# EAGLE board Prototype (EAGLE 4.16)
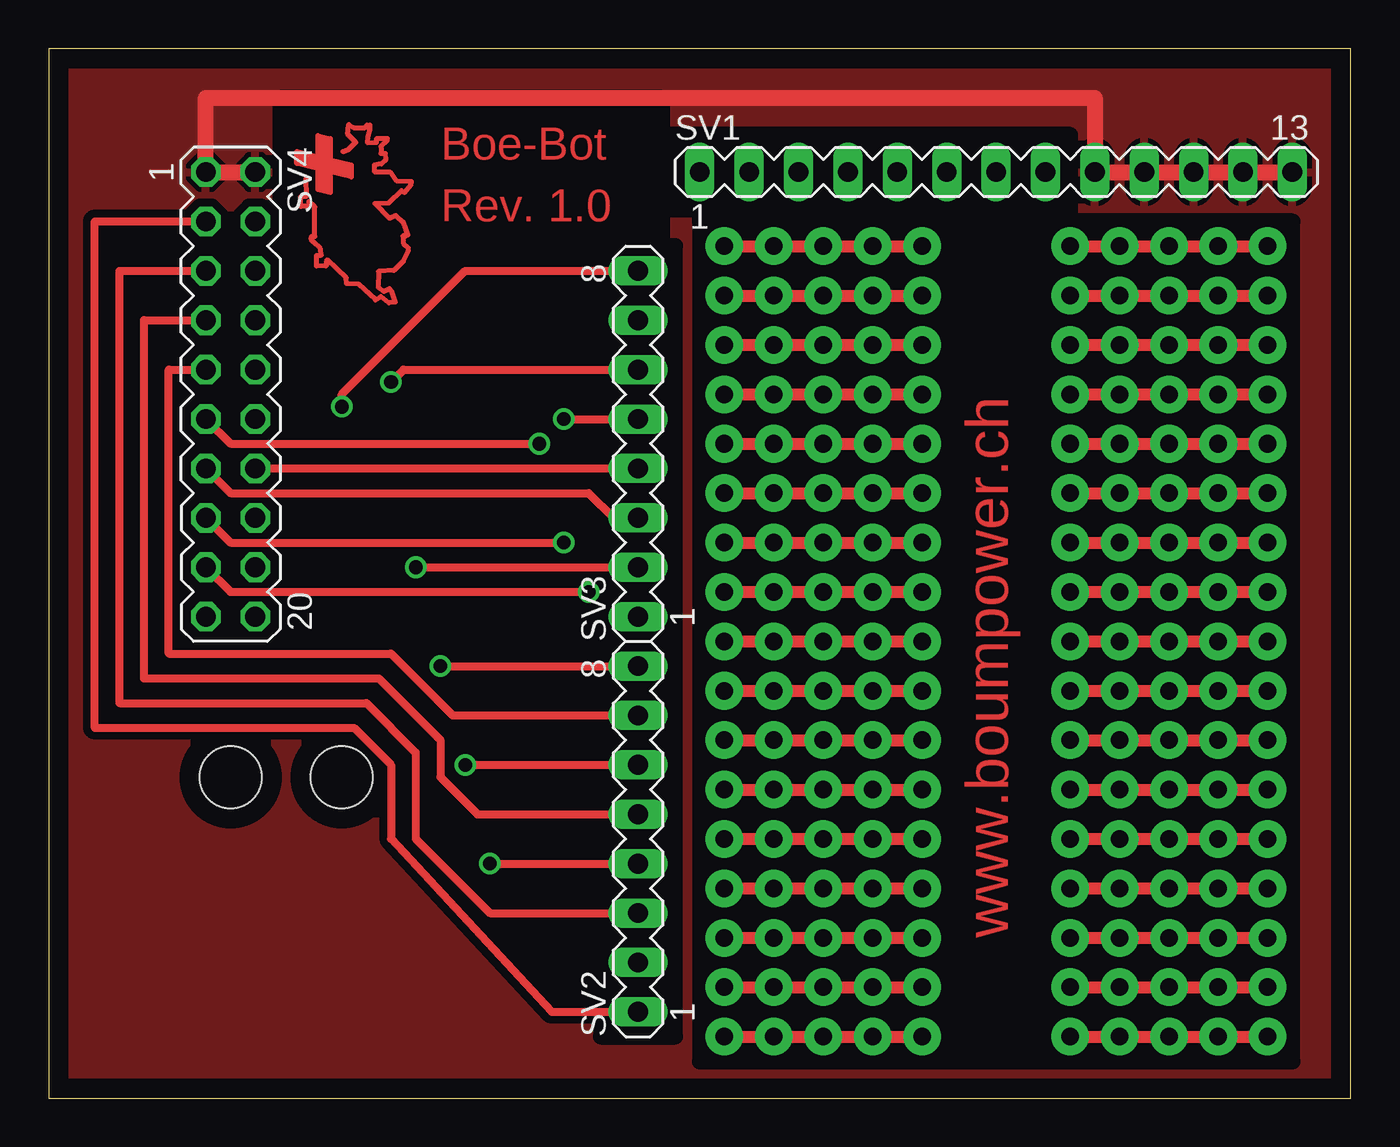
[diagram p0: board, top side]
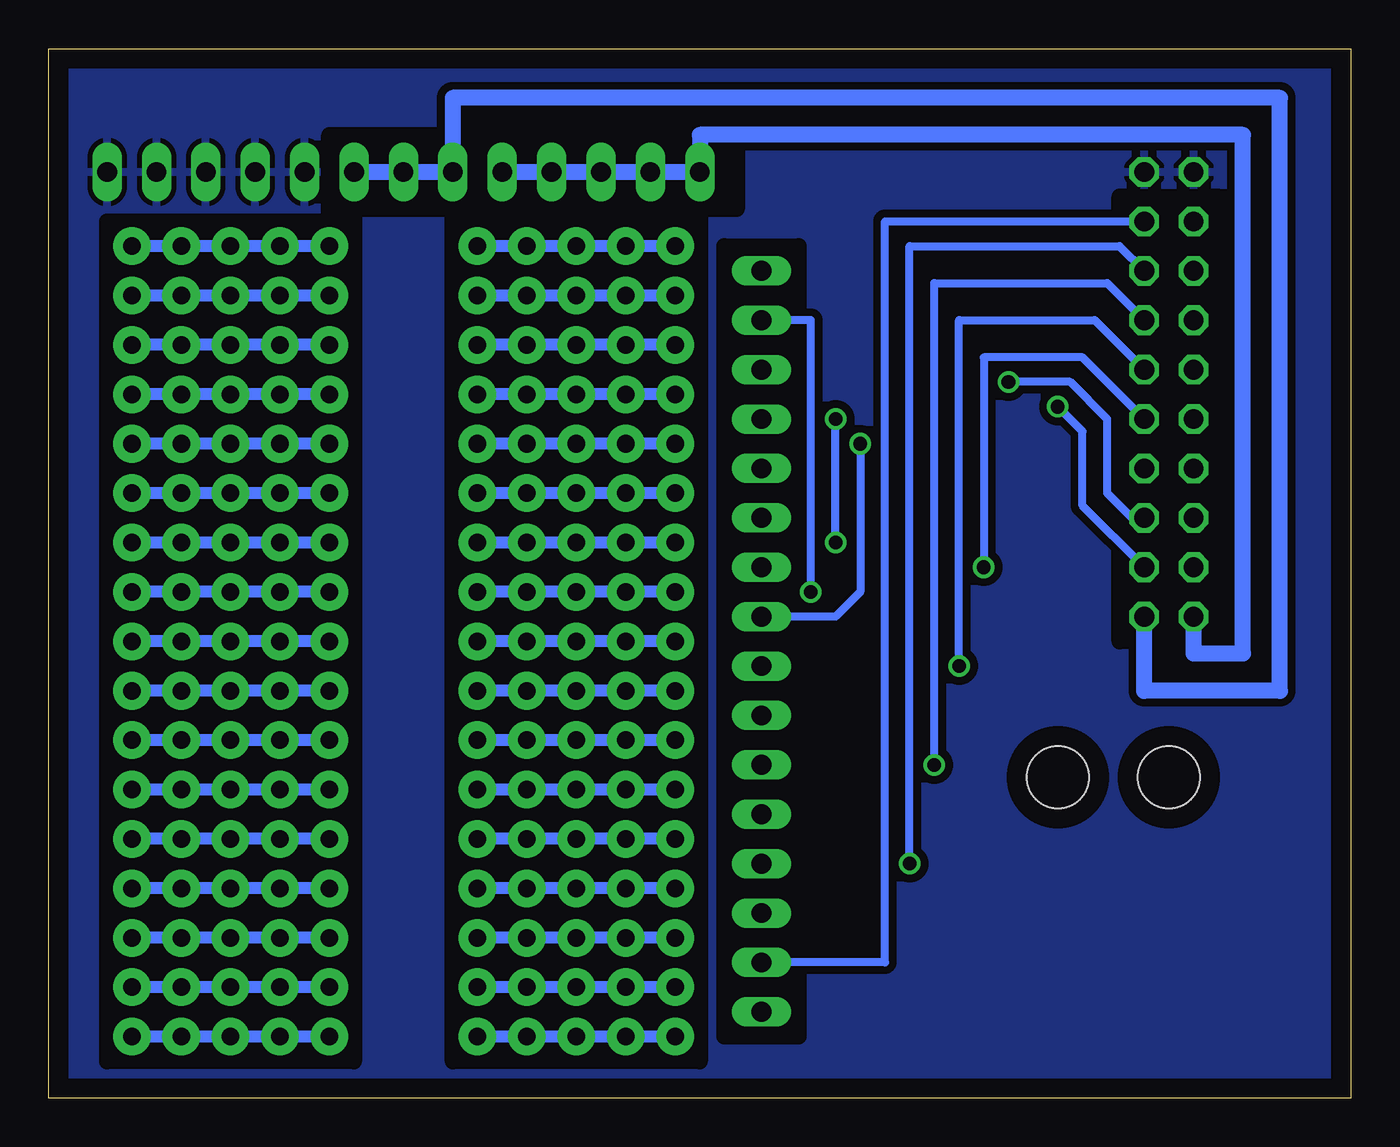
[diagram p1: board, bottom side, seen from below]

Size 66.98 x 53.96 mm. Coordinates in mm from the lower left corner, seen from the top.
Outline: 0,0 66.98,0 66.98,53.96 0,53.96 0,0
Copper layers (1*16): Top 0.035mm / dielectric 1.5mm / Bottom 0.035mm
Design rules "Olimex 10mils": minimum track width 10mil, minimum drill 24mil, track to track 10mil, track to pad 10mil, pad to pad 10mil, via to via 10mil, smd to smd 10mil, copper to edge 40mil, drill to drill 10mil, minimum pad ring 10mil, minimum via ring 8mil, stop-mask expansion 0mil, vias tented up to drill 0mil, thermal gap 10mil
Holes 3.2 mm at 9.36,16.51 15.07,16.51
tRestrict: area 44.9,7.6 to 52.5,38.7; area 11.9,39.4 to 31.6,51.4; area 33.5,1.9 to 64,45.1; area 28.4,3.2 to 32.2,43.8; area 31.6,45.7 to 52.5,49.5
bRestrict: area 33.5,1.9 to 46.2,45.1; area 51.3,1.9 to 64,45.1; area 28.4,3.2 to 32.2,43.8; area 6.8,23.5 to 11.9,46.4; area 31.6,45.7 to 52.5,49.5

## Footprints (pad centres in the part's own frame; a part is rotated, then mirrored left to right if it is on the bottom)
MA13-1 = drill 1.016 long: 1 -15.24,0; 2 -12.7,0; 3 -10.16,0; 4 -7.62,0; 5 -5.08,0; 6 -2.54,0; 7 0,0; 8 2.54,0; 9 5.08,0; 10 7.62,0; 11 10.16,0; 12 12.7,0; 13 15.24,0
MA08-1 = drill 1.016 long: 1 -8.89,0; 2 -6.35,0; 3 -3.81,0; 4 -1.27,0; 5 1.27,0; 6 3.81,0; 7 6.35,0; 8 8.89,0
MA10-2 = drill 1.016 octagon: 1 -11.43,-1.27; 2 -11.43,1.27; 3 -8.89,-1.27; 4 -8.89,1.27; 5 -6.35,-1.27; 6 -6.35,1.27; 7 -3.81,-1.27; 8 -3.81,1.27; 9 -1.27,-1.27; 10 -1.27,1.27; 11 1.27,-1.27; 12 1.27,1.27; 13 3.81,-1.27; 14 3.81,1.27; 15 6.35,-1.27; 16 6.35,1.27; 17 8.89,-1.27; 18 8.89,1.27; 19 11.43,-1.27; 20 11.43,1.27

## Placement (x,y rotation side)
SV1  [MA13-1]  48.73,47.62 0 top
SV2  [MA08-1]  30.32,13.33 90 top
SV3  [MA08-1]  30.32,33.65 90 top
SV4  [MA10-2]  9.36,36.19 270 top
U$1  SUISSE  [SUISSE]  15.71,45.71 90 top

## Library data of the parts
SV1-SV3 = con-lstb
SV4 = Boe-Bot
U$1 = BP_Symbol

## Nets
P0: SV2.1 SV4.3
P1: SV2.2 SV4.4
P2: SV2.3 SV4.5
P3: SV2.4 SV4.6
P4: SV2.5 SV4.7
P5: SV2.6 SV4.8
P6: SV2.7 SV4.9
P7: SV2.8 SV4.10
P8: SV3.1 SV4.11
P9: SV3.2 SV4.12
P10: SV3.3 SV4.13
P11: SV3.4 SV4.14
P12: SV3.5 SV4.15
P13: SV3.6 SV4.16
P14: SV3.7 SV4.17
P15: SV3.8 SV4.18
VDD: SV1.1 SV1.2 SV1.3 SV1.4 SV1.5 SV4.19
VIN: SV1.6 SV1.7 SV1.8 SV4.20
VSS: SV1.9 SV1.10 SV1.11 SV1.12 SV1.13 SV4.1 SV4.2

## Tracks (layer width: path | path; a pad name or v marks a point on that pad's centre or on a via)
N$1  (via drill 0.9 pad 1.93)
  Top 0.61: v34.76,41.27 v44.92,41.27
  Bottom 0.61: v34.76,41.27 v44.92,41.27
N$2  (via drill 0.9 pad 1.93)
  Top 0.61: v34.76,43.81 v44.92,43.81
  Bottom 0.61: v34.76,43.81 v44.92,43.81
N$3  (via drill 0.9 pad 1.93)
  other vias: 37.3,43.81
N$4  (via drill 0.9 pad 1.93)
  other vias: 39.84,43.81
N$5  (via drill 0.9 pad 1.93)
  other vias: 42.38,43.81
N$7  (via drill 0.9 pad 1.93)
  other vias: 37.3,41.27
N$8  (via drill 0.9 pad 1.93)
  other vias: 39.84,41.27
N$9  (via drill 0.9 pad 1.93)
  other vias: 42.38,41.27
N$11  (via drill 0.9 pad 1.93)
  Top 0.61: v52.54,43.81 v62.7,43.81
  Bottom 0.61: v52.54,43.81 v62.7,43.81
N$12  (via drill 0.9 pad 1.93)
  other vias: 55.08,43.81
N$13  (via drill 0.9 pad 1.93)
  other vias: 57.62,43.81
N$14  (via drill 0.9 pad 1.93)
  other vias: 60.16,43.81
N$17  (via drill 0.9 pad 1.93)
  other vias: 60.16,41.27
N$18  (via drill 0.9 pad 1.93)
  other vias: 57.62,41.27
N$19  (via drill 0.9 pad 1.93)
  other vias: 55.08,41.27
N$20  (via drill 0.9 pad 1.93)
  Top 0.61: v52.54,41.27 v62.7,41.27
  Bottom 0.61: v52.54,41.27 v62.7,41.27
N$21  (via drill 0.9 pad 1.93)
  Top 0.61: v34.76,38.73 v44.92,38.73
  Bottom 0.61: v34.76,38.73 v44.92,38.73
N$22  (via drill 0.9 pad 1.93)
  other vias: 37.3,38.73
N$23  (via drill 0.9 pad 1.93)
  other vias: 39.84,38.73
N$24  (via drill 0.9 pad 1.93)
  other vias: 42.38,38.73
N$26  (via drill 0.9 pad 1.93)
  Top 0.61: v52.54,38.73 v62.7,38.73
  Bottom 0.61: v52.54,38.73 v62.7,38.73
N$27  (via drill 0.9 pad 1.93)
  other vias: 55.08,38.73
N$28  (via drill 0.9 pad 1.93)
  other vias: 57.62,38.73
N$29  (via drill 0.9 pad 1.93)
  other vias: 60.16,38.73
N$32  (via drill 0.9 pad 1.93)
  other vias: 60.16,36.19
N$33  (via drill 0.9 pad 1.93)
  other vias: 57.62,36.19
N$34  (via drill 0.9 pad 1.93)
  other vias: 55.08,36.19
N$35  (via drill 0.9 pad 1.93)
  Top 0.61: v52.54,36.19 v62.7,36.19
  Bottom 0.61: v52.54,36.19 v62.7,36.19
N$37  (via drill 0.9 pad 1.93)
  other vias: 42.38,36.19
N$38  (via drill 0.9 pad 1.93)
  other vias: 39.84,36.19
N$39  (via drill 0.9 pad 1.93)
  other vias: 37.3,36.19
N$40  (via drill 0.9 pad 1.93)
  Top 0.61: v34.76,36.19 v44.92,36.19
  Bottom 0.61: v34.76,36.19 v44.92,36.19
N$41  (via drill 0.9 pad 1.93)
  Top 0.61: v34.76,33.65 v44.92,33.65
  Bottom 0.61: v34.76,33.65 v44.92,33.65
N$42  (via drill 0.9 pad 1.93)
  other vias: 37.3,33.65
N$43  (via drill 0.9 pad 1.93)
  other vias: 39.84,33.65
N$44  (via drill 0.9 pad 1.93)
  other vias: 42.38,33.65
N$46  (via drill 0.9 pad 1.93)
  Top 0.61: v52.54,33.65 v62.7,33.65
  Bottom 0.61: v52.54,33.65 v62.7,33.65
N$47  (via drill 0.9 pad 1.93)
  other vias: 55.08,33.65
N$48  (via drill 0.9 pad 1.93)
  other vias: 57.62,33.65
N$49  (via drill 0.9 pad 1.93)
  other vias: 60.16,33.65
N$52  (via drill 0.9 pad 1.93)
  other vias: 60.16,31.11
N$53  (via drill 0.9 pad 1.93)
  other vias: 57.62,31.11
N$54  (via drill 0.9 pad 1.93)
  other vias: 55.08,31.11
N$55  (via drill 0.9 pad 1.93)
  Top 0.61: v52.54,31.11 v62.7,31.11
  Bottom 0.61: v52.54,31.11 v62.7,31.11
N$57  (via drill 0.9 pad 1.93)
  other vias: 42.38,31.11
N$58  (via drill 0.9 pad 1.93)
  other vias: 39.84,31.11
N$59  (via drill 0.9 pad 1.93)
  other vias: 37.3,31.11
N$60  (via drill 0.9 pad 1.93)
  Top 0.61: v34.76,31.11 v44.92,31.11
  Bottom 0.61: v34.76,31.11 v44.92,31.11
N$61  (via drill 0.9 pad 1.93)
  Top 0.61: v34.76,28.57 v44.92,28.57
  Bottom 0.61: v34.76,28.57 v44.92,28.57
N$62  (via drill 0.9 pad 1.93)
  other vias: 37.3,28.57
N$63  (via drill 0.9 pad 1.93)
  other vias: 39.84,28.57
N$64  (via drill 0.9 pad 1.93)
  other vias: 42.38,28.57
N$66  (via drill 0.9 pad 1.93)
  Top 0.61: v52.54,28.57 v62.7,28.57
  Bottom 0.61: v52.54,28.57 v62.7,28.57
N$67  (via drill 0.9 pad 1.93)
  other vias: 55.08,28.57
N$68  (via drill 0.9 pad 1.93)
  other vias: 57.62,28.57
N$69  (via drill 0.9 pad 1.93)
  other vias: 60.16,28.57
N$72  (via drill 0.9 pad 1.93)
  other vias: 60.16,26.03
N$73  (via drill 0.9 pad 1.93)
  other vias: 57.62,26.03
N$74  (via drill 0.9 pad 1.93)
  other vias: 55.08,26.03
N$75  (via drill 0.9 pad 1.93)
  Top 0.61: v52.54,26.03 v62.7,26.03
  Bottom 0.61: v52.54,26.03 v62.7,26.03
N$77  (via drill 0.9 pad 1.93)
  other vias: 42.38,26.03
N$78  (via drill 0.9 pad 1.93)
  other vias: 39.84,26.03
N$79  (via drill 0.9 pad 1.93)
  other vias: 37.3,26.03
N$80  (via drill 0.9 pad 1.93)
  Top 0.61: v34.76,26.03 v44.92,26.03
  Bottom 0.61: v34.76,26.03 v44.92,26.03
N$81  (via drill 0.9 pad 1.93)
  Top 0.61: v34.76,23.49 v44.92,23.49
  Bottom 0.61: v34.76,23.49 v44.92,23.49
N$82  (via drill 0.9 pad 1.93)
  other vias: 37.3,23.49
N$83  (via drill 0.9 pad 1.93)
  other vias: 39.84,23.49
N$84  (via drill 0.9 pad 1.93)
  other vias: 42.38,23.49
N$86  (via drill 0.9 pad 1.93)
  Top 0.61: v52.54,23.49 v62.7,23.49
  Bottom 0.61: v52.54,23.49 v62.7,23.49
N$87  (via drill 0.9 pad 1.93)
  other vias: 55.08,23.49
N$88  (via drill 0.9 pad 1.93)
  other vias: 57.62,23.49
N$89  (via drill 0.9 pad 1.93)
  other vias: 60.16,23.49
N$92  (via drill 0.9 pad 1.93)
  other vias: 60.16,20.95
N$93  (via drill 0.9 pad 1.93)
  other vias: 57.62,20.95
N$94  (via drill 0.9 pad 1.93)
  other vias: 55.08,20.95
N$95  (via drill 0.9 pad 1.93)
  Top 0.61: v52.54,20.95 v62.7,20.95
  Bottom 0.61: v52.54,20.95 v62.7,20.95
N$97  (via drill 0.9 pad 1.93)
  other vias: 42.38,20.95
N$98  (via drill 0.9 pad 1.93)
  other vias: 39.84,20.95
N$99  (via drill 0.9 pad 1.93)
  other vias: 37.3,20.95
N$100  (via drill 0.9 pad 1.93)
  Top 0.61: v34.76,20.95 v44.92,20.95
  Bottom 0.61: v34.76,20.95 v44.92,20.95
N$101  (via drill 0.9 pad 1.93)
  Top 0.61: v34.76,18.41 v44.92,18.41
  Bottom 0.61: v34.76,18.41 v44.92,18.41
N$102  (via drill 0.9 pad 1.93)
  other vias: 37.3,18.41
N$103  (via drill 0.9 pad 1.93)
  other vias: 39.84,18.41
N$104  (via drill 0.9 pad 1.93)
  other vias: 42.38,18.41
N$106  (via drill 0.9 pad 1.93)
  Top 0.61: v52.54,18.41 v62.7,18.41
  Bottom 0.61: v52.54,18.41 v62.7,18.41
N$107  (via drill 0.9 pad 1.93)
  other vias: 55.08,18.41
N$108  (via drill 0.9 pad 1.93)
  other vias: 57.62,18.41
N$109  (via drill 0.9 pad 1.93)
  other vias: 60.16,18.41
N$112  (via drill 0.9 pad 1.93)
  other vias: 60.16,15.87
N$113  (via drill 0.9 pad 1.93)
  other vias: 57.62,15.87
N$114  (via drill 0.9 pad 1.93)
  other vias: 55.08,15.87
N$115  (via drill 0.9 pad 1.93)
  Top 0.61: v52.54,15.87 v62.7,15.87
  Bottom 0.61: v52.54,15.87 v62.7,15.87
N$117  (via drill 0.9 pad 1.93)
  other vias: 42.38,15.87
N$118  (via drill 0.9 pad 1.93)
  other vias: 39.84,15.87
N$119  (via drill 0.9 pad 1.93)
  other vias: 37.3,15.87
N$120  (via drill 0.9 pad 1.93)
  Top 0.61: v34.76,15.87 v44.92,15.87
  Bottom 0.61: v34.76,15.87 v44.92,15.87
N$121  (via drill 0.9 pad 1.93)
  Top 0.61: v34.76,13.33 v44.92,13.33
  Bottom 0.61: v34.76,13.33 v44.92,13.33
N$122  (via drill 0.9 pad 1.93)
  other vias: 37.3,13.33
N$123  (via drill 0.9 pad 1.93)
  other vias: 39.84,13.33
N$124  (via drill 0.9 pad 1.93)
  other vias: 42.38,13.33
N$126  (via drill 0.9 pad 1.93)
  Top 0.61: v52.54,13.33 v62.7,13.33
  Bottom 0.61: v52.54,13.33 v62.7,13.33
N$127  (via drill 0.9 pad 1.93)
  other vias: 55.08,13.33
N$128  (via drill 0.9 pad 1.93)
  other vias: 57.62,13.33
N$129  (via drill 0.9 pad 1.93)
  other vias: 60.16,13.33
N$131  (via drill 0.9 pad 1.93)
  Top 0.61: v34.76,10.79 v44.92,10.79
  Bottom 0.61: v34.76,10.79 v44.92,10.79
N$132  (via drill 0.9 pad 1.93)
  other vias: 37.3,10.79
N$133  (via drill 0.9 pad 1.93)
  other vias: 39.84,10.79
N$134  (via drill 0.9 pad 1.93)
  other vias: 42.38,10.79
N$136  (via drill 0.9 pad 1.93)
  Top 0.61: v52.54,10.79 v62.7,10.79
  Bottom 0.61: v52.54,10.79 v62.7,10.79
N$137  (via drill 0.9 pad 1.93)
  other vias: 55.08,10.79
N$138  (via drill 0.9 pad 1.93)
  other vias: 57.62,10.79
N$139  (via drill 0.9 pad 1.93)
  other vias: 60.16,10.79
N$142  (via drill 0.9 pad 1.93)
  other vias: 60.16,8.25
N$143  (via drill 0.9 pad 1.93)
  other vias: 57.62,8.25
N$144  (via drill 0.9 pad 1.93)
  other vias: 55.08,8.25
N$145  (via drill 0.9 pad 1.93)
  Top 0.61: v52.54,8.25 v62.7,8.25
  Bottom 0.61: v52.54,8.25 v62.7,8.25
N$147  (via drill 0.9 pad 1.93)
  other vias: 42.38,8.25
N$148  (via drill 0.9 pad 1.93)
  other vias: 39.84,8.25
N$149  (via drill 0.9 pad 1.93)
  other vias: 37.3,8.25
N$150  (via drill 0.9 pad 1.93)
  Top 0.61: v34.76,8.25 v44.92,8.25
  Bottom 0.61: v34.76,8.25 v44.92,8.25
N$151  (via drill 0.9 pad 1.93)
  Top 0.61: v34.76,5.71 v44.92,5.71
  Bottom 0.61: v34.76,5.71 v44.92,5.71
N$152  (via drill 0.9 pad 1.93)
  other vias: 37.3,5.71
N$153  (via drill 0.9 pad 1.93)
  other vias: 39.84,5.71
N$154  (via drill 0.9 pad 1.93)
  other vias: 42.38,5.71
N$156  (via drill 0.9 pad 1.93)
  Top 0.61: v52.54,5.71 v62.7,5.71
  Bottom 0.61: v52.54,5.71 v62.7,5.71
N$157  (via drill 0.9 pad 1.93)
  other vias: 55.08,5.71
N$158  (via drill 0.9 pad 1.93)
  other vias: 57.62,5.71
N$159  (via drill 0.9 pad 1.93)
  other vias: 60.16,5.71
N$162  (via drill 0.9 pad 1.93)
  other vias: 60.16,3.17
N$163  (via drill 0.9 pad 1.93)
  other vias: 57.62,3.17
N$164  (via drill 0.9 pad 1.93)
  other vias: 55.08,3.17
N$165  (via drill 0.9 pad 1.93)
  Top 0.61: v52.54,3.17 v62.7,3.17
  Bottom 0.61: v52.54,3.17 v62.7,3.17
N$167  (via drill 0.9 pad 1.93)
  other vias: 42.38,3.17
N$168  (via drill 0.9 pad 1.93)
  other vias: 39.84,3.17
N$169  (via drill 0.9 pad 1.93)
  other vias: 37.3,3.17
N$170  (via drill 0.9 pad 1.93)
  Top 0.61: v34.76,3.17 v44.92,3.17
  Bottom 0.61: v34.76,3.17 v44.92,3.17
P0
  Top 0.406: SV4.3 2.38,45.08 2.38,19.05 15.71,19.05 17.62,17.14 17.62,13.33 25.87,4.44 SV2.1
P1
  Bottom 0.406: SV4.4 23.96,45.08 23.96,6.98 SV2.2
P2
  Top 0.406: SV4.5 3.65,42.54 3.65,20.31 16.35,20.31 18.89,17.77 18.89,13.33 22.7,9.52 SV2.3
P3  (via drill 0.7)
  Top 0.406: v22.7,12.06 SV2.4
  Bottom 0.406: v22.7,12.06 22.7,43.81 11.9,43.81 SV4.6
P4
  Top 0.406: SV4.7 4.92,40 4.92,21.59 16.98,21.59 20.16,18.41 20.16,16.51 22.06,14.6 SV2.5
P5  (via drill 0.7)
  Top 0.406: v21.43,17.14 SV2.6
  Bottom 0.406: v21.43,17.14 21.43,41.91 12.54,41.91 SV4.8
P6
  Top 0.406: SV4.9 6.18,37.46 6.18,22.85 17.62,22.85 20.79,19.68 SV2.7
P7  (via drill 0.7)
  Top 0.406: v20.16,22.22 SV2.8
  Bottom 0.406: v20.16,22.22 20.16,40 13.17,40 SV4.10
P8  (via drill 0.7)
  Top 0.406: SV4.11 9.36,33.65 v25.23,33.65
  Bottom 0.406: v25.23,33.65 25.23,26.03 26.5,24.76 SV3.1
P9  (via drill 0.7)
  Top 0.406: v18.89,27.3 SV3.2
  Bottom 0.406: v18.89,27.3 18.89,38.09 13.8,38.09 SV4.12
P10
  Top 0.406: SV4.13 9.36,31.11 27.78,31.11 29.04,29.84 SV3.3
P11
  Top 0.406: SV4.14 SV3.4
P12  (via drill 0.7)
  Top 0.406: SV4.15 9.36,28.57 v26.5,28.57 | v26.5,34.92 SV3.5
  Bottom 0.406: v26.5,28.57 v26.5,34.92
P13  (via drill 0.7)
  Top 0.406: v17.62,36.82 18.25,37.46 SV3.6
  Bottom 0.406: SV4.16 11.27,29.84 12.54,31.11 12.54,34.92 14.44,36.82 v17.62,36.82
P14  (via drill 0.7)
  Top 0.406: SV4.17 9.36,26.03 v27.78,26.03
  Bottom 0.406: v27.78,26.03 27.78,40 SV3.7
P15  (via drill 0.7)
  Top 0.406: v15.07,35.55 15.07,36.19 21.43,42.54 SV3.8
  Bottom 0.406: SV4.18 13.8,30.48 13.8,34.28 v15.07,35.55
VDD
  Bottom 0.813: SV4.19 8.09,22.85 5.55,22.85 5.55,49.52 33.49,49.52 SV1.1 SV1.2 SV1.3 SV1.4 SV1.5
VIN
  Bottom 0.813: SV4.20 10.63,20.95 3.65,20.95 3.65,51.43 46.19,51.43 SV1.6 SV1.7 SV1.8
VSS
  Top 0.813: SV4.2 SV4.1 8.09,51.43 53.81,51.43 SV1.9 SV1.10 SV1.11 SV1.12 SV1.13
  pour Bottom (isolate 0.406): -0.17,54.61 67.15,54.61 67.15,0 -0.17,0
  pour Top (isolate 0.406): 0.47,53.97 66.51,53.97 66.51,0.63 0.47,0.63

## Text on the board
Top: Boe-Bot | Rev. 1.0 | www.boumpower.ch
tSilk: Vdd | Vin | Vss | P15 | P14 | P13 | P12 | P11 | P10 | P9 | P8 | P7 | X1 | P6 | P5 | P4 | P3 | P2 | P1 | P0